# Altium PCB PCB1.PcbDoc
Units mm, origin at the board's own origin, x right, y up, seen from the top; angles counter-clockwise.
Board outline 100 x 100 mm, 2 copper layers (Top Layer, Bottom Layer); 2 components, 38 nets, 84 pads, 42 vias.
Unrouted connection lines stored in the file: 42.
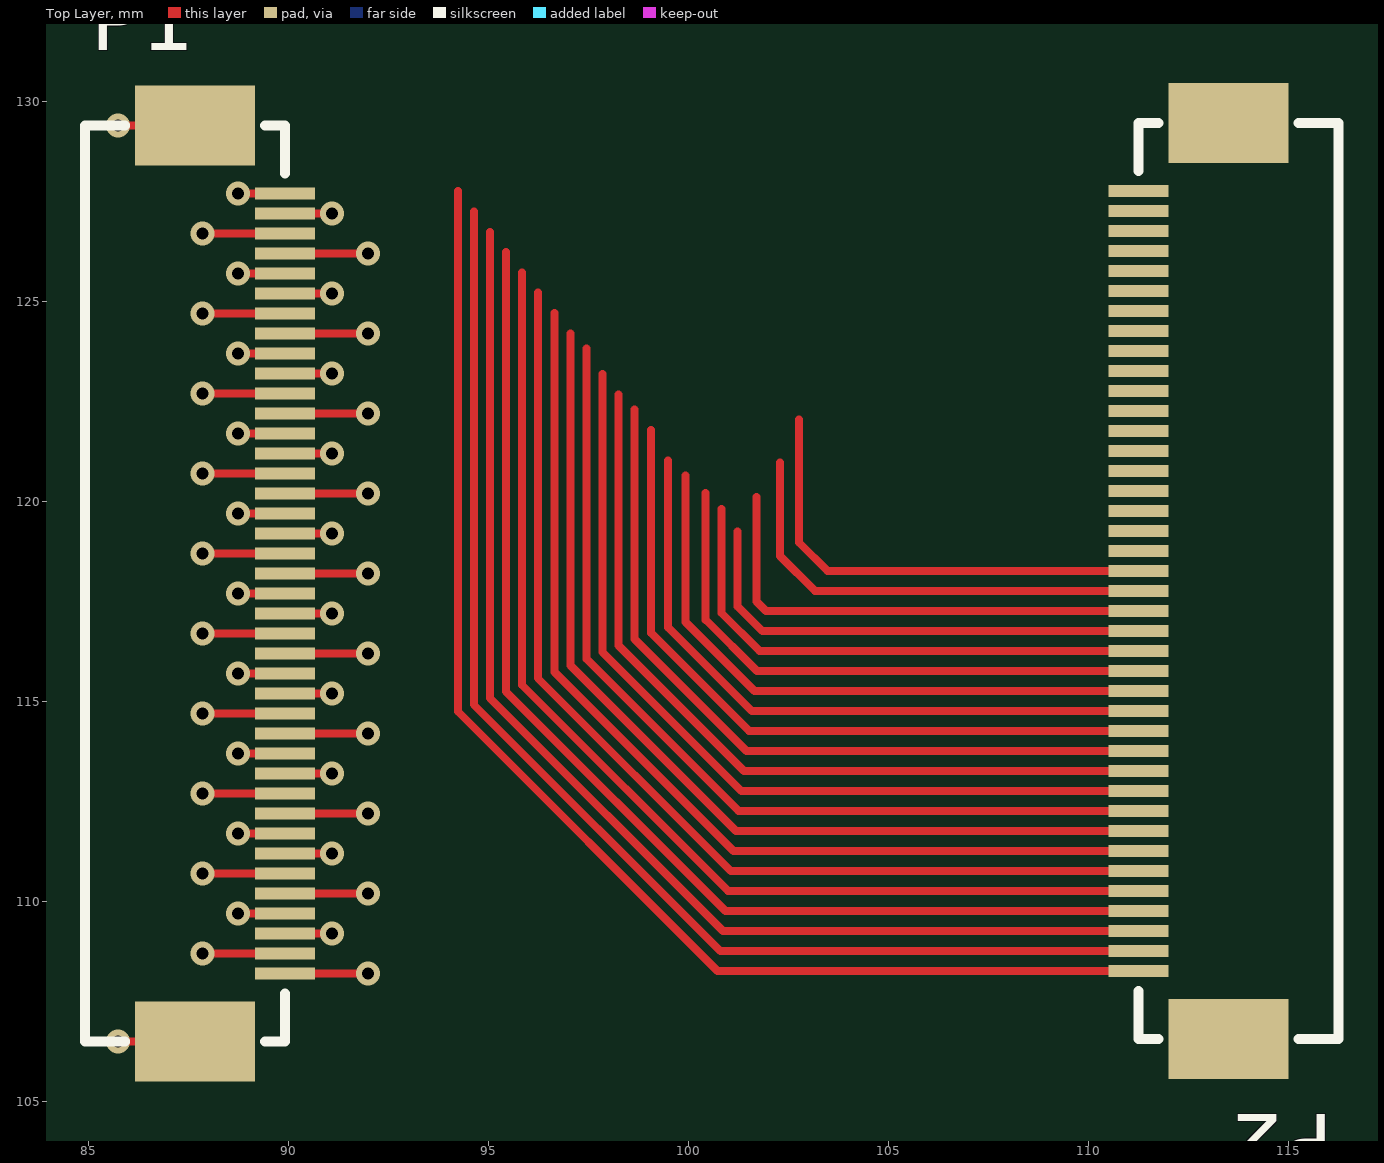
[diagram p0: Top Layer view]
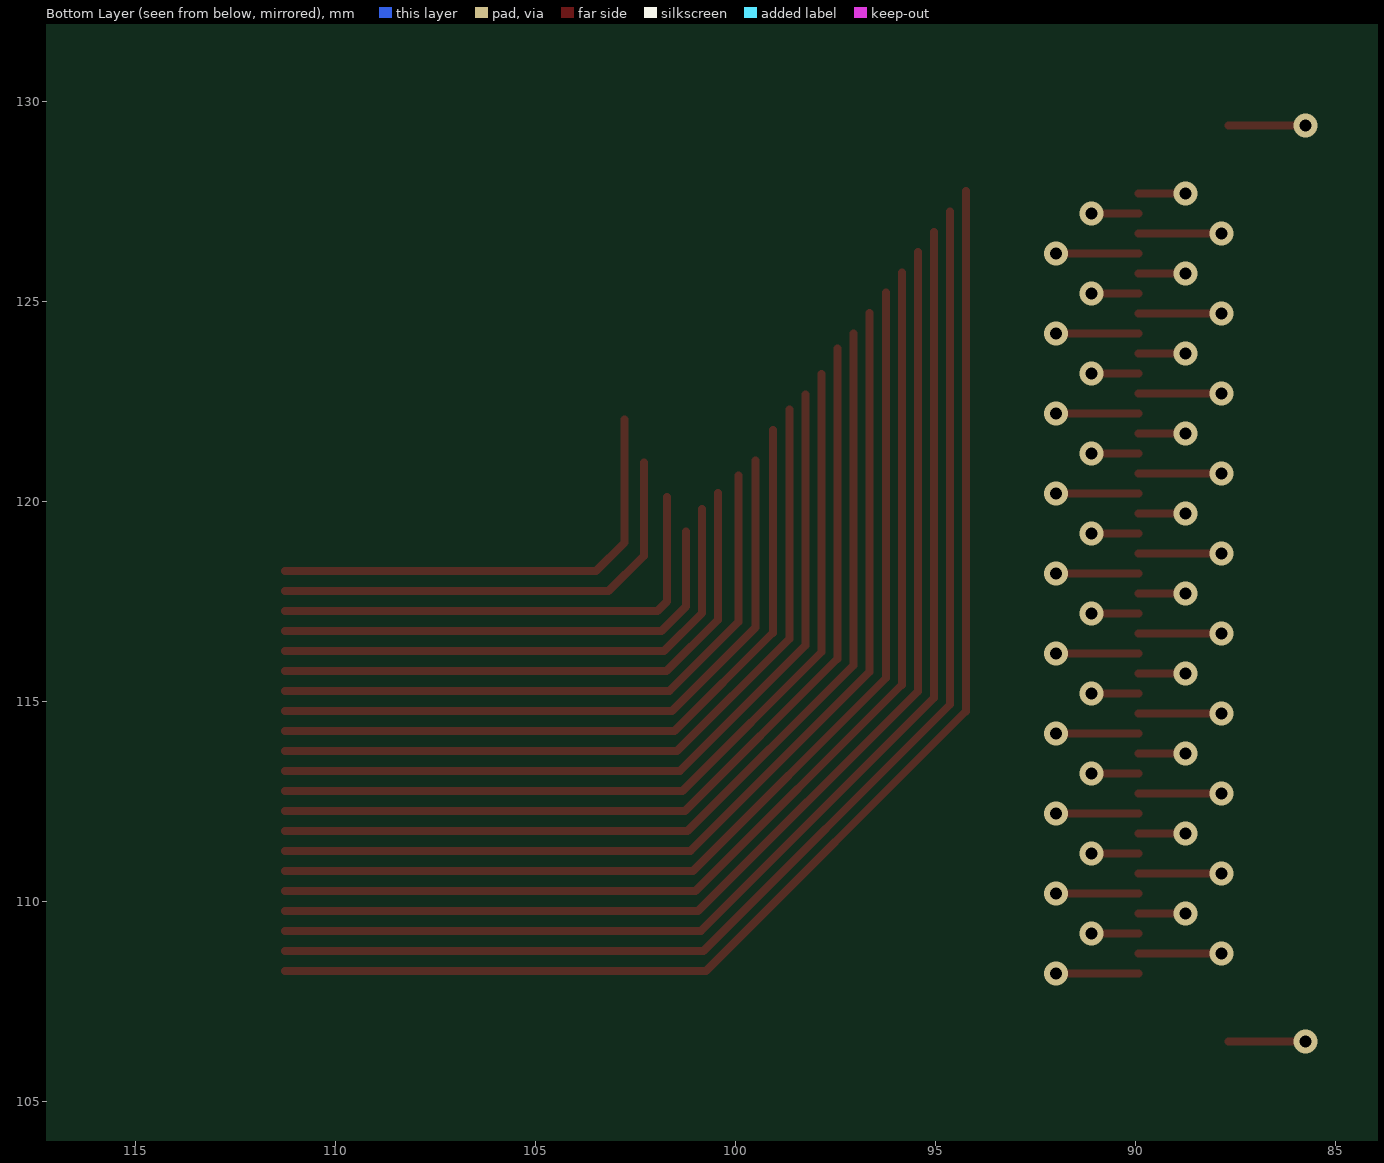
[diagram p1: Bottom Layer view, seen from below]

## Layer stack, top to bottom
Top Solder: solder mask 0.0102, Solder Resist, Dk 3.5
Top Layer: signal copper 0.0356
Dielectric 1: dielectric 0.32, FR-4, Dk 4.8
Bottom Layer: signal copper 0.0356
Bottom Solder: solder mask 0.0102, Solder Resist, Dk 3.5

## Board outline
50.8,76.2 150.8,76.2 150.8,176.2 50.8,176.2

## Design rules (kind name [scope] priority, off if disabled: settings)
Clearance [All] p1: gap=0.2
PolygonConnect [All] p1: connectstyle=Relief reliefconductorwidth=0.254 reliefentries=4 polygonreliefangle="90 Angle" airgapwidth=0.254
RoutingVias [All] p1: holewidth=0.3 width=0.6 viastyle="Through Hole" minholewidth=0.3 minwidth=0.6 maxholewidth=3 maxwidth=6
SolderMaskExpansion [All] p1: expansion=0.102
Width [All] p1: maxlimit=0.2 minlimit=0.2 preferedwidth=0.2
30 further rules are at their usual default settings.

## Components (designator, comment, footprint, x,y, rotation, side; value= is the part's Value field where it differs from the comment)
P1 "Header 20X2" FPC_40pin_05mm 89.916,108.204 r90 top
P2 "Header 20X2" FPC_40pin_05mm 111.252,127.762 r270 top

## Footprints (in the part's own frame and the unit in brackets; to place one, negate y for a bottom-side part, rotate by r counter-clockwise, add the part's x,y. Pads: shape width x height; smd on the part's side, far side on the other; paste and mask are expansions set on the pad)
FPC_40pin_05mm [mm]
  rect 2x3 smd: 0(-1.7,2.25) 0(21.2,2.25)
  rect 0.3x1.5 smd: 1(0,0) 2(0.5,0) 3(1,0) 4(1.5,0) 5(2,0) 6(2.5,0) 7(3,0) 8(3.5,0) 9(4,0) 10(4.5,0) 11(5,0) 12(5.5,0) 13(6,0) 14(6.5,0) 15(7,0) 16(7.5,0) 17(8,0) 18(8.5,0) 19(9,0) 20(9.5,0) 21(10,0) 22(10.5,0) 23(11,0) 24(11.5,0) 25(12,0) 26(12.5,0) 27(13,0) 28(13.5,0) 29(14,0) 30(14.5,0) 31(15,0) 32(15.5,0) 33(16,0) 34(16.5,0) 35(17,0) 36(17.5,0) 37(18,0) 38(18.5,0) 39(19,0) 40(19.5,0)
  silkscreen extent -1.7,0 21.2,5

## Part data
P1 P2: "Header, 20-Pin, Dual row"

## Via types
v1: diameter 0.6, hole 0.3, Top Layer to Bottom Layer, 42 vias

## Nets (pads, with @x,y where several pads share a name; then routed paths per layer and width w, separated by ;. In a path a pad name is that pad's centre, name@x,y a point inside that pad or via, vN(x,y) a via of type N, cw(c..) or ccw(c..) an arc to the next point about the centre after c; other vN are vias at no path point)
LEFT_D0: P1.16 P2.16 | length 1.2
  Top Layer w0.2: v1(88.739,115.704) P1.16
LEFT_D1: P1.15 P2.15 | length 1.2
  Top Layer w0.2: P1.15 v1(91.093,115.204)
LEFT_D2: P1.14 P2.14 | length 2.1
  Top Layer w0.2: v1(87.848,114.704) P1.14
LEFT_D3: P1.13 P2.13 | length 2.1
  Top Layer w0.2: P1.13 v1(91.984,114.204)
LEFT_D4: P1.12 P2.12 | length 1.2
  Top Layer w0.2: v1(88.739,113.704) P1.12
LEFT_D5: P1.11 P2.11 | length 1.2
  Top Layer w0.2: P1.11 v1(91.093,113.204)
LEFT_D6: P1.10 P2.10 | length 2.1
  Top Layer w0.2: v1(87.848,112.704) P1.10
LEFT_D7: P1.9 P2.9 | length 2.1
  Top Layer w0.2: P1.9 v1(91.984,112.204)
LEFT_GND: P1.2 P1.17 P2.2 P2.17 | length 4.1
  Top Layer w0.2: v1(87.848,108.704) P1.2 ; P1.17 v1(91.984,116.204)
LEFT_HREF: P1.6 P2.6 | length 2.1
  Top Layer w0.2: v1(87.848,110.704) P1.6
LEFT_NC1: P1.18 P2.18 | length 2.1
  Top Layer w0.2: v1(87.848,116.704) P1.18
LEFT_NC2: P1.19 P2.19 | length 1.2
  Top Layer w0.2: P1.19 v1(91.093,117.204)
LEFT_NC3: P1.20 P2.20 | length 13
  Top Layer w0.2: v1(88.739,117.704) P1.20 ; 102.768,122.047 102.768,118.974 103.48,118.262 P2.20
LEFT_PCLK: P1.7 P2.7 | length 1.2
  Top Layer w0.2: P1.7 v1(91.093,111.204)
LEFT_SCL: P1.3 P2.3 | length 1.2
  Top Layer w0.2: P1.3 v1(91.093,109.204)
LEFT_SDA: P1.4 P2.4 | length 1.2
  Top Layer w0.2: v1(88.739,109.704) P1.4
LEFT_SYNC: P1.5 P2.5 | length 2.1
  Top Layer w0.2: P1.5 v1(91.984,110.204)
LEFT_VCC: P1.1 P2.1 | length 2.1
  Top Layer w0.2: P1.1 v1(91.984,108.204)
LEFT_XCLK: P1.8 P2.8 | length 1.2
  Top Layer w0.2: v1(88.739,111.704) P1.8
RIGHT_D0: P1.36 P2.36 | length 29
  Top Layer w0.2: v1(88.739,125.704) P1.36 ; 95.834,125.73 95.834,115.42 100.992,110.262 P2.36
RIGHT_D1: P1.35 P2.35 | length 27.8
  Top Layer w0.2: P1.35 v1(91.093,125.204) ; 96.234,125.222 96.234,115.586 101.058,110.762 P2.35
RIGHT_D2: P1.34 P2.34 | length 27.5
  Top Layer w0.2: v1(87.848,124.704) P1.34 ; 96.647,124.714 96.647,115.738 101.123,111.262 P2.34
RIGHT_D3: P1.33 P2.33 | length 26.3
  Top Layer w0.2: P1.33 v1(91.984,124.204) ; 97.047,124.206 97.047,115.904 101.189,111.762 P2.33
RIGHT_D4: P1.32 P2.32 | length 24.3
  Top Layer w0.2: v1(88.739,123.704) P1.32 ; 97.447,123.825 97.447,116.07 101.255,112.262 P2.32
RIGHT_D5: P1.31 P2.31 | length 23
  Top Layer w0.2: P1.31 v1(91.093,123.204) ; 97.847,123.19 97.847,116.235 101.32,112.762 P2.31
RIGHT_D6: P1.30 P2.30 | length 22.7
  Top Layer w0.2: v1(87.848,122.704) P1.30 ; 98.247,122.682 98.247,116.401 101.386,113.262 P2.30
RIGHT_D7: P1.29 P2.29 | length 21.6
  Top Layer w0.2: P1.29 v1(91.984,122.204) ; 98.647,122.301 98.647,116.567 101.452,113.762 P2.29
RIGHT_GND: P1.22 P1.37 P2.22 P2.37 | length 45.5
  Top Layer w0.2: v1(87.848,118.704) P1.22 ; P1.37 v1(91.984,126.204) ; 95.434,126.238 95.434,115.254 100.926,109.762 P2.37 ; 101.702,120.117 101.702,117.5 101.94,117.262 P2.22
RIGHT_HREF: P1.26 P2.26 | length 17.8
  Top Layer w0.2: v1(87.848,120.704) P1.26 ; 99.924,120.65 99.924,116.987 101.649,115.262 P2.26
RIGHT_NC1: P1.38 P2.38 | length 32.4
  Top Layer w0.2: v1(87.848,126.704) P1.38 ; 95.034,126.746 95.034,115.089 100.861,109.262 P2.38
RIGHT_NC2: P1.39 P2.39 | length 32.7
  Top Layer w0.2: P1.39 v1(91.093,127.204) ; 94.634,127.254 94.634,114.923 100.795,108.762 P2.39
RIGHT_NC3: P1.40 P2.40 | length 33.9
  Top Layer w0.2: v1(88.739,127.704) P1.40 ; 94.234,127.762 94.234,114.757 100.729,108.262 P2.40
RIGHT_PCLK: P1.27 P2.27 | length 18
  Top Layer w0.2: P1.27 v1(91.093,121.204) ; 99.492,121.031 99.492,116.853 101.583,114.762 P2.27
RIGHT_SCL: P1.23 P2.23 | length 13.3
  Top Layer w0.2: P1.23 v1(91.093,119.204) ; 101.232,119.253 101.232,117.376 101.846,116.762 P2.23
RIGHT_SDA: P1.24 P2.24 | length 14.6
  Top Layer w0.2: v1(88.739,119.704) P1.24 ; 100.832,119.812 100.832,117.211 101.78,116.262 P2.24
RIGHT_SYNC: P1.25 P2.25 | length 16.6
  Top Layer w0.2: P1.25 v1(91.984,120.204) ; 100.432,120.218 100.432,117.045 101.714,115.762 P2.25
RIGHT_VCC: P1.21 P2.21 | length 13.7
  Top Layer w0.2: P1.21 v1(91.984,118.204) ; 102.286,120.98 102.286,118.643 103.167,117.762 P2.21
RIGHT_XCLK: P1.28 P2.28 | length 19.5
  Top Layer w0.2: v1(88.739,121.704) P1.28 ; 99.06,121.793 99.06,116.719 101.517,114.262 P2.28
pads on no net: P1.0 P2.0
copper on no net: | length 3.9
  Top Layer w0.2: v1(85.739,106.504) 85.961,106.504 87.666,106.504 ; v1(85.739,129.404) 85.961,129.404 87.666,129.404

## Silkscreen, mask and mechanical layers (free items; w line width, h text height)
Top Overlay:
  text "OV5640 Stereo Camera V3_0" at 87.528,97.188 h1
  text "Designed by LiuYang" at 87.528,94.688 h1
  text "github.com/liuyang9609" at 87.528,92.188 h1
Bottom Overlay:
  text "JLCJLCJLCJLC" at 90.424,87.706 h1.2